# Altium PCB PCB2.PcbDoc
Units mm, origin at the board's own origin, x right, y up, seen from the top; angles counter-clockwise.
Board outline 96.81 x 51.91 mm, 2 copper layers (Top Layer, Bottom Layer); 58 components, 56 nets, 232 pads, 41 vias.
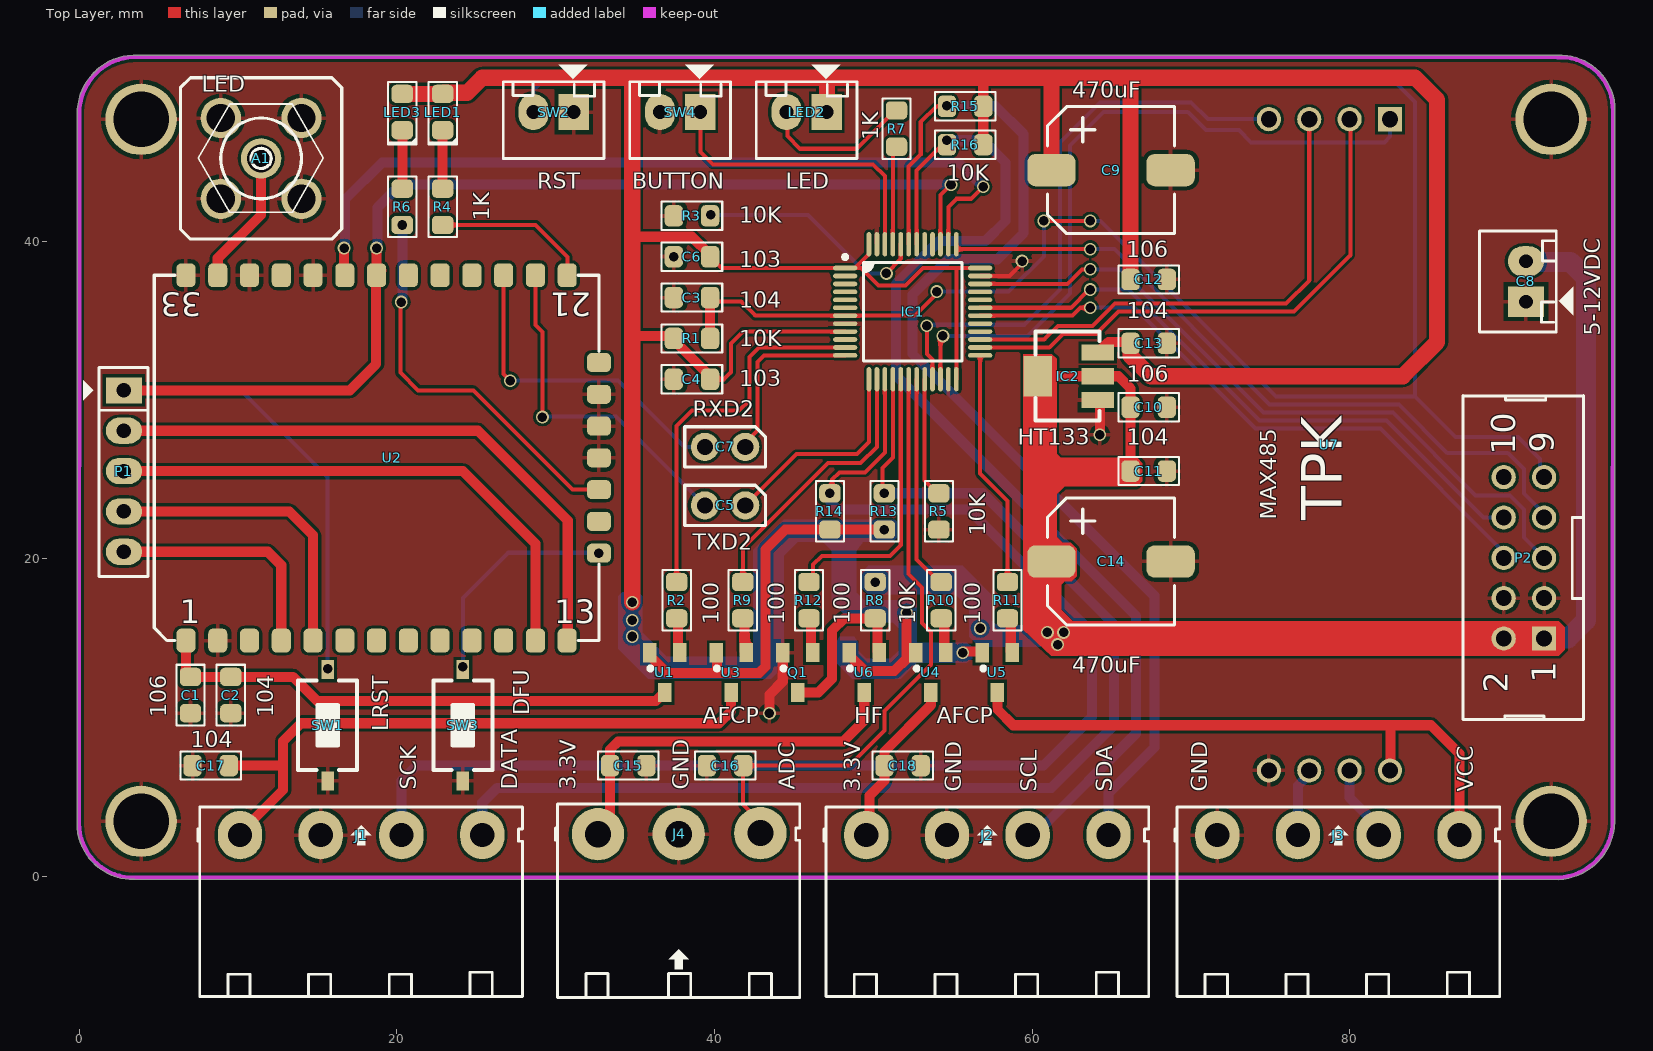
[diagram p0: Top Layer view]
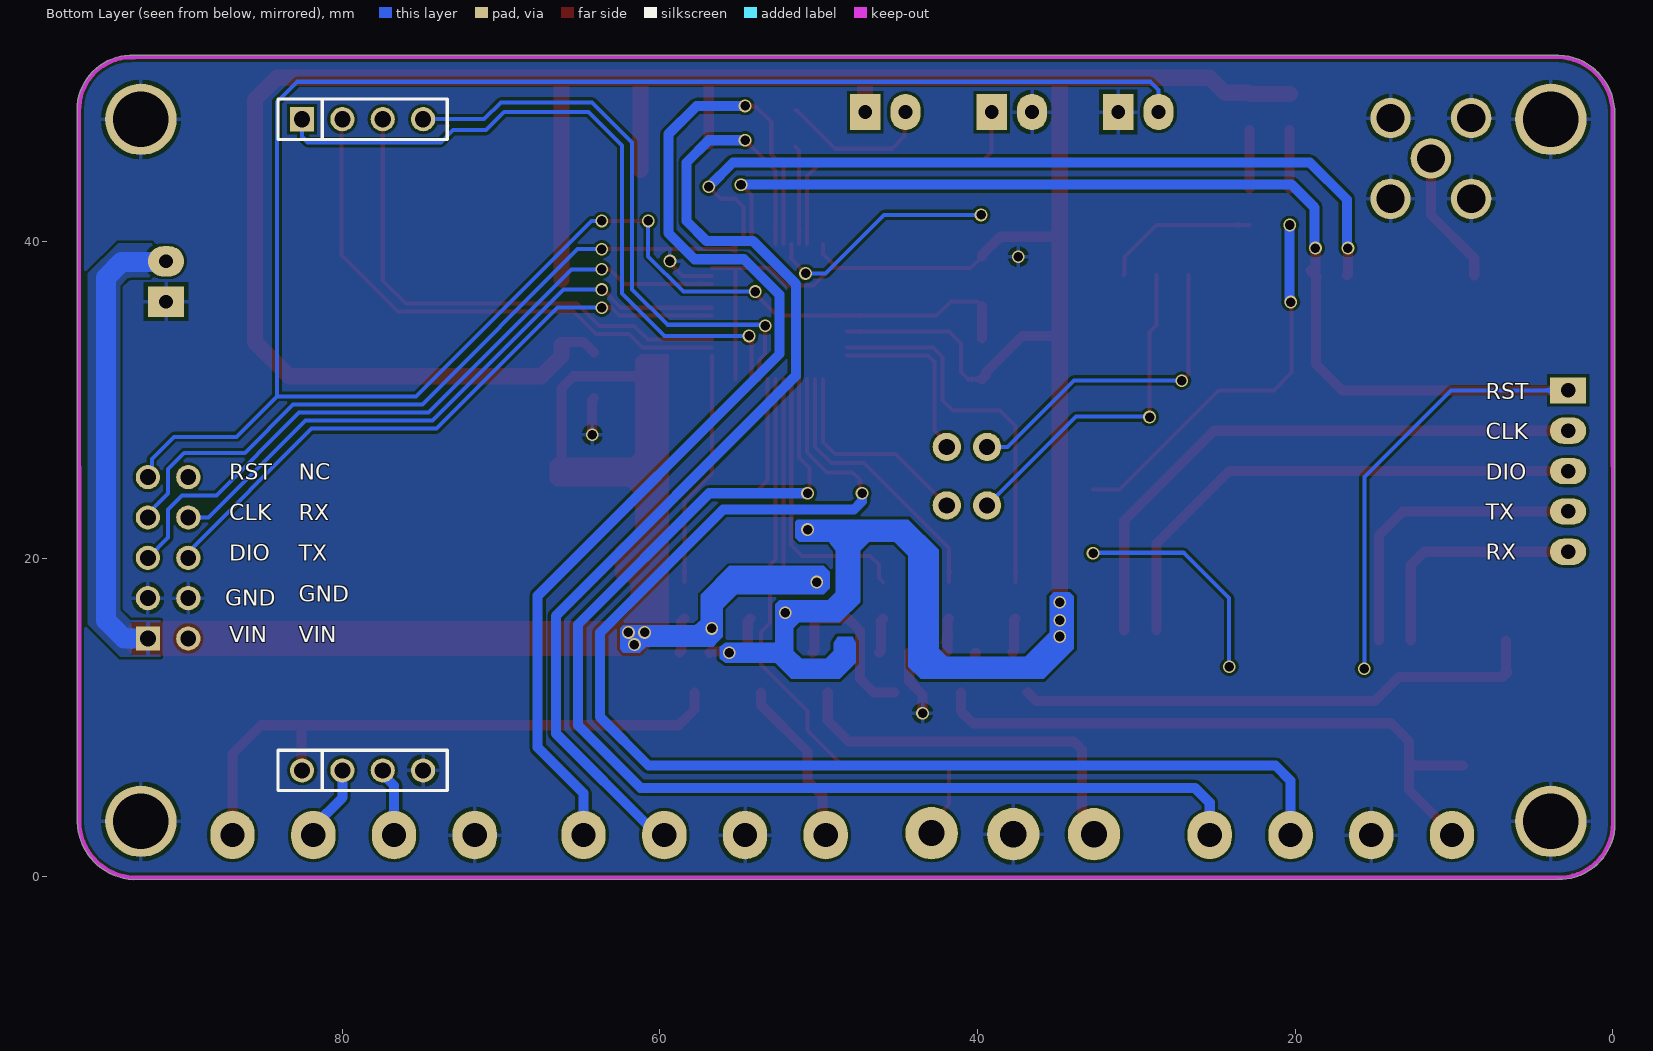
[diagram p1: Bottom Layer view, seen from below]

## Layer stack, top to bottom
Top Solder: solder mask 0.0102, Solder Resist, Dk 3.5
Top Layer: signal copper 0.0356
Dielectric 1: dielectric 0.32, FR-4, Dk 4.8
Bottom Layer: signal copper 0.0356
Bottom Solder: solder mask 0.0102, Solder Resist, Dk 3.5

## Board outline
-0.127,3.339 -0.116,48.26 cw(c0.011,48.26) -0.108,48.306 cw(c3.552,48.049) 3.398,51.714 cw(c3.403,51.587) 3.403,51.714 93.06,51.703 cw(c93.063,51.576) 93.069,51.703 cw(c93.252,48.276) 96.684,48.276 cw(c93.252,48.276) 96.684,48.208 96.672,3.429 cw(c96.545,3.429) 96.672,3.426 cw(c92.957,3.52) 93.16,-0.192 cw(c93.153,-0.065) 93.153,-0.192 3.496,-0.181 cw(c3.388,3.332)

## Design rules (kind name [scope] priority, off if disabled: settings)
Clearance [All] p1: gap=0.178 ignorepadtopadclearanceinfootprint=FALSE
PlaneClearance [All] p1: clearance=0.254
PlaneConnect [All] p1: planeconnectstyle=Relief reliefexpansion=0.254 reliefentries=4 reliefconductorwidth=0.508 reliefairgap=0.254
PolygonConnect [All] p1: connectstyle=Relief reliefconductorwidth=0.254 reliefentries=4 polygonreliefangle="90 Angle" airgapwidth=0.254
RoutingVias [All] p1: holewidth=0.6 width=0.8 viastyle="Through Hole" minholewidth=0.4 minwidth=0.5 maxholewidth=0.7 maxwidth=0.9
SolderMaskExpansion [All] p1: expansion=0.102
Width [All] p1: maxlimit=1.27 minlimit=0.254 preferedwidth=0.635
28 further rules are at their usual default settings.

## Components (designator, comment, footprint, x,y, rotation, side; value= is the part's Value field where it differs from the comment)
A1 "" SMA-V 11.455,45.212 r90 top
C1 "106" "CAP 0805" 7.01,11.43 r270 top value=103
C2 "104" "CAP 0805" 9.55,11.43 r90 top value=103
C3 "104" "CAP 0805" 38.582,36.453 r0 top value=103
C4 "103" "CAP 0805" 38.582,31.31 r180 top
C5 "JP2" JP2-CLOSED 41.935,23.368 r270 top
C6 "103" "CAP 0805" 38.582,39.025 r180 top
C7 "JP2" JP2-CLOSED 41.935,27.051 r270 top
C8 "Header2" Header2 91.084,36.195 r90 top
C9 "470uF" Tu_Nhom 65.049,44.45 r0 top
C10 "106" "CAP 0805" 67.335,29.549 r0 top value=103
C11 "104" "CAP 0805" 67.335,25.527 r0 top value=103
C12 "106" "CAP 0805" 67.335,37.592 r0 top value=103
C13 "104" "CAP 0805" 67.335,33.57 r0 top value=103
C14 "470uF" Tu_Nhom 65.049,19.812 r0 top
C15 "104" "CAP 0805" 34.569,6.985 r0 top value=103
C16 "104" "CAP 0805" 40.665,6.985 r180 top value=103
C17 "104" "CAP 0805" 8.28,6.985 r180 top value=103
C18 "104" "CAP 0805" 51.841,6.985 r0 top value=103
IC1 "ST STM32L152 48PIN" "ST LQFP-48 7x7MM" 52.476,35.56 r0 top
IC2 "HT133" HT7133 63.097,31.754 r0 top
J1 "KF4" KF4 10.128,2.609 r0 top
J2 "KF4" KF4 49.555,2.609 r0 top
J3 "KF4" KF4 71.652,2.609 r0 top
J4 "KF3" KF3-5.08T 32.664,2.667 r0 top
LED1 "LED" "LED 0805" 22.885,48.133 r270 top value="LED 3 - 5 ly 2 Colour"
LED2 "LED" Header2 47.074,48.133 r180 top value="LED 3 - 5 ly 2 Colour"
LED3 "LED" "LED 0805" 20.345,48.133 r270 top value="LED 3 - 5 ly 2 Colour"
P1 "JP5" JP5 2.819,30.607 r270 top
P2 "SPI" IDE_2X5 92.227,14.986 r90 top value="Header 5x2"
Q1 "HF" SOT23B 45.237,12.847 r180 top value=C1815
R1 "10K" "RES 0805/2012" 38.582,33.882 r180 top value=1K
R2 "100" "RES 0805/2012" 37.617,17.399 r90 top value=1K
R3 "10K" "RES 0805/2012" 38.582,41.597 r0 top value=1K
R4 "1K" "RES 0805/2012" 22.885,42.164 r90 top
R5 "10K" "RES 0805/2012" 54.127,22.987 r270 top value=1K
R6 "1K" "RES 0805/2012" 20.345,42.164 r90 top
R7 "1K" "RES 0805/2012" 51.46,47.092 r90 top
R8 "10K" "RES 0805/2012" 50.114,17.399 r90 top value=1K
R9 "100" "RES 0805/2012" 41.783,17.399 r90 top value=1K
R10 "100" "RES 0805/2012" 54.279,17.399 r90 top value=1K
R11 "100" "RES 0805/2012" 58.445,17.399 r90 top value=1K
R12 "100" "RES 0805/2012" 45.948,17.399 r90 top value=1K
R13 "10K" "RES 0805/2012" 50.698,22.987 r270 top value=1K
R14 "10K" "RES 0805/2012" 47.269,22.987 r270 top value=1K
R15 "10K" "RES 0805/2012" 55.778,48.49 r0 top value=1K
R16 "10K" "RES 0805/2012" 55.778,46.077 r0 top value=1K
SW1 "LRST" SW1-SMD 15.646,9.525 r270 top value="SW chip 2 pin"
SW2 "RST" Header2 31.14,48.133 r180 top value="SW chip 2 pin"
SW3 "DFU" SW1-SMD 24.155,9.525 r90 top value="SW chip 2 pin"
SW4 "RST" Header2 39.107,48.133 r180 top value="SW chip 2 pin"
U1 "AO3415" SOT23B 36.855,12.847 r180 top
U2 "RHF76-052" RHF76-052 19.725,26.359 r0 top
U3 "AO3415" SOT23B 41.046,12.847 r180 top
U4 "AO3415" SOT23B 53.619,12.847 r180 top
U5 "AO3415" SOT23B 57.81,12.847 r180 top
U6 "AFCP" SOT23B 49.428,12.847 r180 top
U7 "MAX485 MODULE" "MODULE MAX485" 77.495,27.432 r270 top

## Footprints (in the part's own frame and the unit in brackets; to place one, negate y for a bottom-side part, rotate by r counter-clockwise, add the part's x,y. Pads: shape width x height; smd on the part's side, far side on the other; paste and mask are expansions set on the pad)
"CAP 0805" [mm]
  rrect50% 1.15x1.35 smd: 1(-1.143,0) 2(1.143,0)
  silkscreen extent -1.91,-0.89 1.91,0.89, body extent -1.01,-0.63 1.01,0.64, height 0.64
Header2 [mil] "CON2"
  rect 75x90 hole 34: 1(0,0)
  oval 75x90 hole 34: 2(100,0)
  silkscreen extent -75,-118 175,115, body extent -68,-70 168,107, height 236
HT7133 [mil]
  rect 80x40 smd: 1(40.85,-69.15) 2(40.85,-10.15) 3(40.85,48.85)
  rect 70x100 smd: 4(-108.15,-10.15)
  silkscreen extent -114,-120 45,101, body extent -114,-101 54,80, height 66
IDE_2X5 [mil]
  rect 60x60 hole 39.37: 1(0,0)
  round 60 hole 39.37: 2(0,100) 3(100,0) 4(100,100) 5(200,0) 6(200,100) 7(300,0) 8(300,100) 9(400,0) 10(400,100)
  silkscreen extent -201,-97 602,201, body extent -200,-117 600,231, height 361
JP2-CLOSED [mil]
  round 70 hole 40: 1(0,0) 2(0,-100)
  silkscreen extent -50,-150 50,50, body extent -50,-152 50,50, height 300
JP5 [mil] "JP5"
  rect 65x90 hole 36: 1(0,0)
  oval 65x90 hole 36: 2(100,0) 3(200,0) 4(300,0) 5(400,0)
  silkscreen extent -57,-101 461,60, body extent -48,-53 448,45, height 323
KF3-5.08T [mil] "Header 3, 3 pin, hight 300mil, Pin to Pin 200, Colour Green"
  round 130 hole 65: 1(0,0) 2(200,0) 3(402.62,2.62)
  silkscreen extent -105,-405 500,75, body extent -95,-404 496,68, height 124
KF4 [mil]
  oval 110x120 hole 60: 1(0,0) 2(200,0) 3(400.06,0.06) 4(600.39,0.39)
  silkscreen extent -105,-400 700,70, body extent -87,-406 690,66, height 334
"LED 0805" [mm]
  rrect50% 1.15x1.35 smd: 1(-1.143,0) 2(1.143,0)
  silkscreen extent -1.91,-0.89 2.03,0.89, body extent -1,-0.62 1,0.63, height 0.9
"MODULE MAX485" [mm]
  rect 1.52x1.52 hole 1.02: 1(-20.249,5.029)
  round 1.52 hole 1.02: 2(-20.249,2.489) 3(-20.249,-0.051) 4(-20.249,-2.591) 5(20.751,-2.591) 6(20.751,-0.051) 7(20.751,2.489) 8(20.751,5.029)
  body extent -21.74,-6.02 22.33,7.98, height 19
"RES 0805/2012" [mm]
  rrect50% 1.15x1.35 smd: 1(-1.143,0) 2(1.143,0)
  silkscreen extent -1.91,-0.89 1.91,0.89, body extent -0.95,-0.62 1.05,0.63, height 0.6
RHF76-052 [mm]
  rrect50% 1.2x1.5 smd: 1(-13,-11.5) 2(-11,-11.5) 3(-9,-11.5) 4(-7,-11.5) 5(-5,-11.5) 6(-3,-11.5) 7(-1,-11.5) 8(1,-11.5) 9(3,-11.5) 10(5,-11.5) 11(7,-11.5) 12(9,-11.5) 13(11,-11.5) 21(11,11.5) 22(9,11.5) 23(7,11.5) 24(5,11.5) 25(3,11.5) 26(1,11.5) 27(-1,11.5) 28(-3,11.5) 29(-5,11.5) 30(-7,11.5) 31(-9,11.5) 32(-11,11.5) 33(-13,11.5)
  rrect50% 1.5x1.2 smd: 14(13,-6) 15(13,-4) 16(13,-2) 17(13,0) 18(13,2) 19(13,4) 20(13,6)
  Top Layer lines w0.254: 13,-6 13.05,-6 13.056,-5.994
  silkscreen extent -15,-11.5 13,11.5, body extent -14.99,-11.43 12.95,11.43, height 2.54
SMA-V [mil]
  round 100 hole 70: 1(0,0) 2(100,-100) 3(100,100) 4(-100,100) 5(-100,-100)
  silkscreen extent -200,-200 200,200, body extent -138,-136 137,140, height 386
SOT23B [mm] "SOT 23B"
  rect 0.85x1.2 smd: 1(0.94,-1.245) 2(0,1.25) 3(-0.95,-1.25)
  silkscreen extent 0.77,-0.38 1.02,-0.13, body extent -1.5,-1.3 1.5,1.2, height 1.06
"ST LQFP-48 7x7MM" [mil]
  oval 60x11.5 smd: 1(-167.32,108.27) 2(-167.32,88.58) 3(-167.32,68.9) 4(-167.32,49.21) 5(-167.32,29.53) 6(-167.32,9.84) 7(-167.32,-9.84) 8(-167.32,-29.53) 9(-167.32,-49.21) 10(-167.32,-68.9) 11(-167.32,-88.58) 12(-167.32,-108.27) 25(167.32,-108.27) 26(167.32,-88.58) 27(167.32,-68.9) 28(167.32,-49.21) 29(167.32,-29.53) 30(167.32,-9.84) 31(167.32,9.84) 32(167.32,29.53) 33(167.32,49.21) 34(167.32,68.9) 35(167.32,88.58) 36(167.32,108.27)
  oval 11.5x60 smd: 13(-108.27,-167.32) 14(-88.58,-167.32) 15(-68.9,-167.32) 16(-49.21,-167.32) 17(-29.53,-167.32) 18(-9.84,-167.32) 19(9.84,-167.32) 20(29.53,-167.32) 21(49.21,-167.32) 22(68.9,-167.32) 23(88.58,-167.32) 24(108.27,-167.32) 37(108.27,167.32) 38(88.58,167.32) 39(68.9,167.32) 40(49.21,167.32) 41(29.53,167.32) 42(9.84,167.32) 43(-9.84,167.32) 44(-29.53,167.32) 45(-49.21,167.32) 46(-68.9,167.32) 47(-88.58,167.32) 48(-108.27,167.32)
  silkscreen extent -172,-122 122,141, body extent -178,-178 178,178, height 61
SW1-SMD [mm]
  rect 1.2x0.8 smd: 1(-3.5,0) 2(3.5,0)
  silkscreen extent -2.82,-1.85 2.82,1.85, body extent -3.05,-1.85 3.05,1.85, height 2.5
Tu_Nhom [mil]
  rrect50% 120x80 smd mask+4: 1(-151,1) 2(144.28,1)
  silkscreen extent -161,-156 154,158, body extent -198,-162 192,164

## Part data
A1: library part "CON Ant", "CONNECTOR ANTEN", Manufacturer="Würth Elektronik eiSos GmbH", partNo=210111003, ComponentLink1Description=Manufacturer, ComponentLink1URL=http://www.we-online.de, ComponentLink2Description=Datasheet, ComponentLink2URL=http://katalog.we-online.de/kataloge/eisos/index.php?language=en&pf=Filter_gerade, Created by="Christin Zierenner", Created Date="May 2012"
C1 C2 C3 C4 C6 C10 C11 C12 C13 C15 C16 C17 C18: library part CM, "Cap SMD"
C5 C7: "WR-PHD 2.54 mm Angled Socket Header", Manufacturer="Würth Elektronik eiSos GmbH", partNo=613002143121, ComponentLink1 Description=Manufacturer, ComponentLink1URL=http://www.we-online.com, ComponentLink2 Description=Datasheet, ComponentLink2URL=http://katalog.we-online.de/em/datasheet/6130xx143121.pdf, Created by="Karrer Zheng", Created Date="29 March 2013", NoPins=02
C8: "Header IDC, 2 x 1 Pin Vertical 2.54mm Pitch (Non-Boxed, Male)", Manufacturer="Würth Elektronik eiSos GmbH", partNo=613002143121, ComponentLink1 Description=Manufacturer, ComponentLink1URL=http://www.we-online.com, ComponentLink2 Description=Datasheet, ComponentLink2URL=http://katalog.we-online.de/em/datasheet/6130xx143121.pdf, Created by="Karrer Zheng", Created Date="29 March 2013", NoPins=02
C9 C14: library part CN-ALU-SMD, "Polarized Capacitor (Axial)", LatestRevisionDate=17-Jul-2002, LatestRevisionNote="Re-released for DXP Platform.", PackageReference=POLAR0.8, Published=8-Jun-2000, Publisher="Altium Limited"
IC2: library part HT73XX_1, "HT73XX"
J1 J2 J3: Manufacturer="Würth Elektronik eiSos GmbH", partNo=691133710004, ComponentLink1 Description=Manufacturer, ComponentLink1 URL=http://www.we-online.com, ComponentLink2 Description=Datasheet, ComponentLink2 URL=http://katalog.we-online.de/em/datasheet/6911337100xx.pdf, Created by="Baojun Chen", Created Date=4-Aug-15, NoPins=4
J4: Manufacturer="Würth Elektronik eiSos GmbH", partNo=691103110003, ComponentLink1 Description=Manufacturer, ComponentLink1URL=http://www.we-online.com, ComponentLink2 Description=Datasheet, ComponentLink2URL=http://katalog.we-online.de/em/datasheet/6911031100xx.pdf, Created by="Karrer Zheng", Created Date="29 October 2013", NoPins=3
LED1 LED2 LED3: library part "LED SMD"
P2: library part "IDE 5x2", "Header 5x2"
Q1: library part C1815, "NPN 600mW, ECB", =C2383
R1 R2 R3 R4 R5 R6 R7 R8 R9 R10 R11 R12 R13 R14 R15 R16: library part RM, "Resistor SMD"
SW1 SW2 SW3 SW4: library part SW2, "Switch button 2 pin"
U6: library part AO3415

## Free pads (board coordinates)
  round 4.5 hole 3.5: 1(3.897,47.674) 2(3.897,3.478) 3(92.67,3.478) 4(92.67,47.674)

## Via types
v1: diameter 0.8, hole 0.6, Top Layer to Bottom Layer, tented both sides, 41 vias

## Nets (pads, with @x,y where several pads share a name; then routed paths per layer and width w, separated by ;. In a path a pad name is that pad's centre, name@x,y a point inside that pad or via, vN(x,y) a via of type N, cw(c..) or ccw(c..) an arc to the next point about the centre after c; other vN are vias at no path point)
ADC: C16.1 IC1.18 J4.3 | length 38.4
  Top Layer w0.254: J4.3 42.891,3.442 41.808,4.525 C16.1 48.488,6.985 50.698,9.195 50.698,10.414 53.619,13.335 53.619,15.404 53.069,15.953 53.069,18.199 52.226,19.042 IC1.18
ADC_EN: IC1.17 R12.2 | length 17.7
  Top Layer w0.254: R12.2 46.209,18.802 46.209,19.641 46.761,20.193 51.034,20.193 51.726,20.885 IC1.17
CLK: IC1.37 P2.7 | length 45.1
  Top Layer w0.254: IC1.37@55.226,39.388 IC1.37@55.244,39.37 ; IC1.37 55.226,39.515 55.244,39.497 v1(63.652,39.497)
  Bottom Layer w0.254: v1@63.906,39.497 65.176,39.497 74.955,29.718 83.083,29.718 86.131,26.67 89.941,26.67 90.957,25.654 90.957,24.13 92.227,22.86 P2.7
DATA: IC1.16 J1.4 R13.1 | length 75.1
  Top Layer w0.254: R13.1@50.571,24.568 50.571,25.717 51.226,26.372 IC1.16
  Bottom Layer w0.635: J1.4 25.378,4.652 26.314,5.588 61.214,5.588 65.151,9.525 65.151,15.875 56.896,24.13 v1(50.698,24.13)
DE: IC1.27 U7.3 | length 32.4
  Top Layer w0.254: IC1.27 60.759,33.81 61.62,34.671 63.803,34.671 65.2,36.068 75.971,36.068 77.444,37.541 U7.3
DIO: IC1.34 P2.5 | length 44.4
  Top Layer w0.254: IC1.34 62.227,37.31 63.144,38.227 v1(63.652,38.227) v1@63.843,38.227
  Bottom Layer w0.254: v1@63.843,38.227 65.557,38.227 74.574,29.21 82.702,29.21 87.909,24.003 90.068,24.003 90.957,23.114 90.957,21.336 P2.5
GND: A1.2 A1.3 A1.4 A1.5 C1.2 C2.1 C3.1 C4.2 C6.2 C8.1 C9.2 C10.2 C11.2 C12.2 C13.2 C14.2 C15.2 C16.2 C17.2 C18.2 IC1.8 IC1.23 IC1.35 IC1.47 IC2.1 J1.2 J2.2 J3.1 J4.2 P2.3 P2.4 pad.1 pad.2 pad.3 pad.4 Q1.1 R3.1 R5.2 SW1.2 SW2.1 SW3.1 SW4.2 U2.2 U2.17 U2.18 U2.19 U2.29 U2.31 U2.33 U7.5 | length 10.2
  Top Layer w0.254: C16.2 39.649,7.112 C16.2@39.649,6.858 ; IC1.35 58.573,37.81 59.363,38.6 v1(59.363,38.748) ; IC2.1 IC2.1@64.135,30.124
  Top Layer w0.635: v1(43.459,10.287) 43.459,11.449 44.297,12.287 Q1.1 ; IC2.1@64.135,30.124 64.262,29.997 v1(64.262,27.812)
  other v1: 37.439,39.025
I2C_EN: IC1.19 R10.2 | length 13.5
  Top Layer w0.254: IC1.19 52.726,19.967 54.151,18.542 R10.2
"MOSITURE EN": IC1.25 R11.2 | length 15
  Top Layer w0.254: IC1.25 56.726,25.373 58.445,23.654 R11.2
NetA1_1: A1.1 U2.32 | length 8.5
  Top Layer w0.635: U2.32 8.725,38.926 11.455,41.656 A1.1
NetC1_1: C1.1 C2.2 U1.2 U2.1 | length 33.2
  Top Layer w0.635: U2.1 6.725,13.003 6.653,12.93 6.653,12.831 6.91,12.573 C1.1 ; C1.1@7.051,12.614 7.091,12.573 C2.2 13.462,12.573 14.986,11.049 36.307,11.049 U1.2
NetC15_1: C15.1 J4.1 U6.2 | length 24.2
  Top Layer w0.635: J4.1 33.426,3.429 C15.1 33.426,8.001 33.934,8.509 48.112,8.509 49.428,9.825 U6.2
NetC17_1: C17.1 J1.1 U3.2 | length 40.6
  Top Layer w0.635: C17.1 12.713,6.985 12.84,7.112 ; J1.1@10.128,2.736 12.84,5.448 12.84,7.112 ; U3.2 41.046,10.414 40.284,9.652 13.97,9.652 12.84,8.522 12.84,7.112
NetC18_1: C18.1 J2.1 U4.2 | length 10.7
  Top Layer w0.635: J2.1 49.759,2.813 49.759,5.086 50.698,6.025 C18.1 50.698,7.87 53.619,10.791 U4.2
NetIC1_20: IC1.20 R5.1 | length 7.7
  Top Layer w0.254: IC1.20 53.226,24.928 R5.1@54.151,24.003
NetIC1_44: IC1.44 R3.2 | length 14.8
  Top Layer w0.254: v1(50.825,37.973) 51.719,38.867 51.719,39.803 IC1.44
  Bottom Layer w0.254: v1(39.776,41.656) 45.872,41.656 49.555,37.973 v1(50.825,37.973)
NetIC1_45: IC1.45 R7.1 | length 6.2
  Top Layer w0.254: IC1.45 51.226,45.715 R7.1
NetIC1_46: IC1.46 SW4.1 | length 19
  Top Layer w0.254: SW4.1 39.107,45.627 39.903,44.831 49.991,44.831 50.726,44.096 IC1.46
NetJ3_1: J3.4 U5.2 U7.8 | length 39.2
  Top Layer w0.635: U5.2 57.81,10.516 58.801,9.525 82.498,9.525 ; U7.8 82.55,6.707 82.55,9.525 85.115,9.525 86.902,7.739 J3.4
NetJ3_2: J3.3 U7.7 | length 4.8
  Bottom Layer w0.635: U7.7 79.984,4.968 81.813,3.139 J3.3
NetJ3_3: J3.2 U7.6 | length 4.4
  Bottom Layer w0.635: J3.2 76.732,5.729 77.444,6.441 U7.6
NetLED1_2: LED1.2 R4.2 | length 3.7
  Top Layer w0.635: R4.2 LED1.2
NetLED2_2: LED2.2 R7.2 | length 10
  Top Layer w0.254: LED2.2 LED2.2@44.602,48.133 ; LED2.2@44.729,48.26 LED2.2@44.602,48.133 ; R7.2 51.36,48.235 48.945,45.82 45.386,45.82 44.597,46.609 44.597,48.128 LED2.2@44.602,48.133
NetLED3_2: LED3.2 R6.2 | length 3.7
  Top Layer w0.635: R6.2 LED3.2
NetQ1_2: Q1.2 R8.1 U6.3 | length 10.9
  Top Layer w0.635: Q1.2 46.547,11.597 47.396,12.446 47.396,15.49 48.162,16.256 R8.1 50.271,16.099 50.271,14.205 U6.3
NetQ1_3: Q1.3 R12.1 | length 2.3
  Top Layer w0.635: R12.1 46.08,16.125 46.08,14.205 Q1.3
NetR2_1: R2.1 U1.3 | length 2.2
  Top Layer w0.635: R2.1 37.711,16.162 37.711,14.191 U1.3
NetR4_1: R4.1 U2.21 | length 9.8
  Top Layer w0.254: R4.1 28.727,41.021 30.732,39.016 30.732,37.944 U2.21@30.791,37.885
NetR6_1: R6.1 U2.16 | length 24.8
  Top Layer w0.254: v1@20.223,36.169 20.223,31.72 21.336,30.607 24.825,30.607 31.073,24.359 U2.16
  Bottom Layer w0.635: v1@20.345,36.195 v1(20.345,41.021)
  other v1: 20.279,36.169
NetR9_1: R9.1 U3.3 | length 2.2
  Top Layer w0.635: R9.1 41.889,16.149 41.889,14.204 U3.3
NetR10_1: R10.1 U4.3 | length 2.3
  Top Layer w0.635: R10.1 54.462,16.074 54.462,14.205 U4.3
NetR11_1: R11.1 U5.3 | length 2.3
  Top Layer w0.635: R11.1 58.653,16.048 58.653,14.205 U5.3
NetSW3_2: SW3.2 U2.14 | length 14.5
  Top Layer w0.254: SW3.2 24.211,13.081 24.282,13.081 v1(24.155,13.208)
  Bottom Layer w0.254: v1(24.155,13.208) 24.155,17.526 27.014,20.385 v1@32.791,20.385
  other v1: 32.725,20.359
RE: IC1.26 U7.2 | length 34.4
  Top Layer w0.254: IC1.26 61.075,33.31 61.928,34.163 64.033,34.163 65.43,35.56 76.479,35.56 80.035,39.116 80.035,47.63 U7.2
  Bottom Layer w0.254: U7.2@79.946,47.643 U7.2
RH_CLK: P1.2 U2.13 | length 37.2
  Top Layer w0.635: P1.2 25.108,28.067 30.759,22.416 U2.13@30.759,15.502
RH_DIO: P1.3 U2.12 | length 33.4
  Top Layer w0.635: P1.3@2.692,25.4 P1.3 24.155,25.527 28.727,20.955 U2.12@28.727,15.534
RH_EN: IC1.11 R2.2 | length 24.1
  Top Layer w0.254: R2.2 37.617,28.372 38.582,29.337 41.554,29.337 42.189,29.972 42.189,32.705 42.794,33.31 IC1.11
RH_PA0: IC1.38 U2.28 | length 51.6
  Top Layer w0.254: IC1.38 54.726,42.154 55.244,42.672 56.159,42.672 v1(56.921,43.434)
  Top Layer w0.635: v1(16.677,39.567) 16.677,37.907 U2.28
  Bottom Layer w0.635: v1@16.743,39.593 16.743,42.626 19.075,44.958 55.397,44.958 v1(56.921,43.434)
RH_RST: IC1.39 P1.1 SW1.1 U2.27 | length 94.6
  Top Layer w0.254: IC1.39 54.226,42.898 v1(54.889,43.561)
  Top Layer w0.635: P1.1 17.043,30.607 18.694,32.258 U2.27@18.694,37.773 ; U2.27@18.628,37.747 U2.27@19.025,38.144 ; U2.27 18.725,38.144 v1@18.725,39.44
  Bottom Layer w0.254: P1.1 10.185,30.607 15.646,25.146 v1(15.646,13.081)
  Bottom Layer w0.635: v1@18.791,39.593 18.791,42.134 20.218,43.561 v1(54.889,43.561)
  other v1: 18.725,39.567
RH_RX: C7.2 U2.23 | length 20.7
  Top Layer w0.254: U2.23 26.725,31.628 v1(27.137,31.216)
  Bottom Layer w0.254: v1@27.203,31.242 33.934,31.242 38.125,27.051 C7.2
RH_RX1: P1.5 U2.4 | length 15
  Top Layer w0.635: P1.5 11.881,20.447 12.725,19.603 U2.4
RH_TX: C5.2 U2.22 | length 21.6
  Top Layer w0.254: U2.22 28.725,34.728 29.169,34.284 v1(29.169,28.93)
  Bottom Layer w0.254: v1@29.235,28.956 33.807,28.956 C5.2
RH_TX1: P1.4 U2.5 | length 19.2
  Top Layer w0.635: P1.4 13.233,22.987 14.725,21.495 U2.5
RST: C3.2 IC1.7 P2.9 R1.1 SW2.2 | length 141.9
  Top Layer w0.254: C3.2@39.986,36.193 41.683,36.193 42.566,35.31 IC1.7 52.607,35.31 54,36.703 v1(54,36.83) ; v1(60.731,41.275) v1(63.652,41.275)
  Top Layer w0.635: R1.1 C3.2@39.725,35.932
  Bottom Layer w0.254: SW2.2 28.6,49.53 29.108,50.038 82.829,50.038 84.099,48.768 84.099,30.226 ; v1(54,36.83) 58.515,36.83 60.731,39.046 v1(60.731,41.275) ; v1(63.652,41.275) 64.287,41.275 75.336,30.226 84.099,30.226 ; P2.9 91.984,25.389 91.984,26.278 90.576,27.686 86.639,27.686 84.099,30.226
RXD1: IC1.31 P2.8 | length 39.4
  Top Layer w0.254: IC1.31 62.429,35.81 63.576,36.957 v1(63.652,36.957)
  Bottom Layer w0.254: v1(63.652,36.957) 66.065,36.957 74.32,28.702 82.321,28.702 88.417,22.606 P2.8
RXD2: C7.1 IC1.12 | length 11.4
  Top Layer w0.254: C7.1 41.935,27.323 42.697,28.085 42.697,32.385 43.122,32.81 IC1.12
RXD3: IC1.22 U7.1 | length 44.3
  Top Layer w0.254: IC1.22 54.226,33.733 54.381,33.888 v1(54.381,34.036)
  Bottom Layer w0.254: v1(54.381,34.036) 59.715,34.036 62.382,36.703 62.382,46.017 64.498,48.133 69.794,48.133 70.937,46.99 73.025,46.99 73.787,46.228 82.169,46.228 82.524,46.583 U7.1
SCK: IC1.15 J1.3 R14.1 | length 83.4
  Top Layer w0.254: R14.1@47.396,24.511 47.396,24.992 47.856,25.452 49.48,25.452 50.726,26.698 IC1.15
  Bottom Layer w0.635: J1.3 20.289,6.04 21.234,6.985 60.706,6.985 63.754,10.033 63.754,15.367 56.007,23.114 47.777,23.114 47.269,23.622 v1(47.269,24.13)
SCL: IC1.42 J2.3 R16.1 | length 67.3
  Top Layer w0.254: IC1.42 52.726,44.446 R16.1@54.357,46.077
  Bottom Layer w0.635: v1(54.635,46.355) 56.921,46.355 58.318,44.958 58.318,41.275 57.048,40.005 54.123,40.005 51.435,37.317 51.435,31.521 66.548,16.408 66.548,9.017 60.396,2.865 J2.3@59.717,2.865
SDA: IC1.43 J2.4 R15.1 | length 72
  Top Layer w0.254: IC1.43 52.226,44.708 52.984,45.466 52.984,47.498 53.976,48.49 R15.1
  Bottom Layer w0.635: v1(54.635,48.514) 57.683,48.514 59.461,46.736 59.461,40.513 57.81,38.862 54.705,38.862 52.47,36.627 52.47,32.899 67.691,17.678 67.691,8.128 64.805,5.242 J2.4
SHT75_EN: IC1.14 R9.2 | length 17.5
  Top Layer w0.254: R9.2 41.783,20.676 47.142,26.035 49.205,26.035 50.226,27.056 IC1.14
TXD1: IC1.30 P2.6 | length 39.9
  Top Layer w0.254: IC1.30 62.54,35.31 63.044,35.814 v1@63.843,35.814
  Bottom Layer w0.254: v1@63.843,35.814 66.446,35.814 74.066,28.194 81.94,28.194 89.687,20.447 P2.6
  other v1: 63.652,35.814
TXD2: C5.1 IC1.13 | length 13.4
  Top Layer w0.254: C5.1 45.161,26.594 48.959,26.594 49.726,27.361 IC1.13
TXD3: IC1.21 U7.4 | length 37
  Top Layer w0.254: v1@53.111,34.671 v1(53.365,34.671) 53.365,32.893 53.719,32.539 53.719,31.317 IC1.21
  Bottom Layer w0.254: v1(53.365,34.671) 53.435,34.741 59.531,34.741 61.747,36.957 61.747,46.228 64.262,48.743 70.002,48.743 71.064,47.681 U7.4
VCC: C4.1 C6.1 C9.1 C12.1 C13.1 IC1.1 IC1.9 IC1.24 IC1.36 IC1.48 IC2.3 LED1.1 LED2.1 LED3.1 R1.2 R13.2 R14.2 R15.2 R16.2 U1.1 U3.1 U4.1 U5.1 U6.1 | length 292.1
  Top Layer w0.254: C4.1 40.606,31.31 41.046,31.75 41.046,33.553 41.803,34.31 IC1.9 ; C6.1 39.725,39.012 40.427,38.31 IC1.1 48.233,38.303 49.225,38.303 50.317,37.211 52.019,37.211 53.118,38.31 55.143,38.31 ; IC1.1@48.86,38.328 49.726,39.194 IC1.48 ; IC1.24 55.226,38.227 55.143,38.31 ; IC1.36 55.143,38.31
  Top Layer w0.635: 34.823,34.036 37.185,34.036 39.468,31.753 39.468,31.567 C4.1 ; 35.055,40.281 38.57,40.281 39.725,39.125 C6.1 ; U1.1 35.915,13.917 37.005,12.827 40.157,12.827 ; U3.1 40.157,14.041 40.157,12.827 ; U6.1 48.488,13.917 49.451,12.954 51.333,12.954 52.095,13.716 v1(52.095,16.609) ; v1(50.698,21.844) R14.2 44.45,21.844 43.205,20.599 43.205,13.208 42.824,12.827 40.157,12.827 ; v1(55.626,14.097) 55.688,14.159 56.802,14.159 U5.1 ; 56.87,50.292 cw(c56.87,50.241) 56.921,50.241 R15.2 R16.2 ; IC2.3 64.795,33.655 66.007,33.655 66.192,33.47 C13.1
  Top Layer w1.016: LED3.1 LED1.1 22.952,49.343 24.429,49.343 25.378,50.292 34.823,50.292 ; v1(34.823,17.272) 34.823,34.036 34.823,50.292 ; LED2.1 47.074,50.122 cw(c47.244,50.122) 47.244,50.292 ; C9.1 61.214,50.292 ; C13.1@66.192,33.47 66.192,32.766 67.462,31.496 83.337,31.496 85.496,33.655 85.496,48.904 84.108,50.292 66.192,50.292 ; C12.1 66.192,50.292 ; 34.823,50.292 47.244,50.292 ; 47.244,50.292 56.87,50.292 61.214,50.292 ; 61.214,50.292 66.192,50.292
  Bottom Layer w0.635: v1(34.823,17.272) v1(34.823,16.129) v1(34.823,15.113) 36.855,13.081 42.824,13.081 43.205,13.462 43.205,20.193 44.856,21.844 48.412,21.844 ; 48.412,14.224 48.412,13.97 49.301,13.081 51.46,13.081 52.095,13.716 52.095,14.097 ; v1(50.698,21.844) 48.412,21.844 ; v1(55.626,14.097) 52.095,14.097 ; 48.412,21.844 48.285,21.717 48.285,17.526 49.202,16.609 v1(52.095,16.609) 52.095,14.097
Vin: C8.2 C10.1 C11.1 C14.1 IC2.2 IC2.4 P2.1 P2.2 R8.2 | length 109.6
  Top Layer w0.635: v1(56.726,15.621) 56.726,15.576 v1@56.763,15.54 ; IC2.4 IC2.2 65.43,31.496 66.192,30.734 C10.1 C11.1
  Top Layer w1.27: IC2.4 60.604,31.242 60.604,25.654 ; C14.1@61.62,19.456 61.239,19.837 C14.1 C14.1@61.214,19.787 ; C11.1 60.731,25.527 60.604,25.654 ; C8.2 C8.2@91.206,38.613 ; P2.1@92.342,15.101 P2.1 P2.2 63.37,14.986 63.365,14.991 62.606,14.991 61.214,16.383 C14.1@61.214,19.787 ; 60.604,25.654 60.604,19.939 60.985,19.558 C14.1@61.214,19.787
  Bottom Layer w0.635: v1(50.114,18.542) 55.397,18.542 56.726,17.213 v1(56.726,15.621) ccw(c56.98,15.621) 56.98,15.367 v1(60.96,15.367) v1(61.976,15.367) ccw(c61.976,14.986) 61.595,14.986 v1(61.595,14.605)
  Bottom Layer w1.27: C8.2 91.121,38.698 93.871,38.698 94.869,37.7 94.869,16.129 93.726,14.986 P2.1
pads on no net: IC1.2 IC1.3 IC1.4 IC1.5 IC1.6 IC1.10 IC1.28 IC1.29 IC1.32 IC1.33 IC1.40 IC1.41 P2.10 U2.3 U2.6 U2.7 U2.8 U2.9 U2.10 U2.11 U2.15 U2.20 U2.24 U2.25 U2.26 U2.30

## Polygon pours and split planes (outlines as drawn)
GND on Bottom Layer "Bottom Layer-GND" (solid, pour order 70): -0.102,46.533 -0.102,49.124 cw(c2.438,49.124) 2.438,51.664 94.005,51.664 cw(c94.005,49.124) 96.545,49.124 96.545,2.486 cw(c94.005,2.486) 94.005,-0.054 2.54,-0.054 cw(c2.54,2.486) 0,2.486 0,5.359
Vin on Bottom Layer "Bottom Layer-Vin" (solid, pour order 42): 91.313,16.129 93.345,16.129 93.98,16.764 93.98,37.211 93.491,37.7 93.345,37.7 93.326,37.719 90.297,37.719 89.789,38.227 89.789,39.37 90.297,39.878 94.107,39.878 96.012,37.973 96.012,15.875 93.98,13.843 91.313,13.843 91.059,14.097 91.084,14.122 91.084,15.748
GND on Top Layer "Top Layer-GND" (solid, pour order 60): 0.011,47.879 0.011,49.2 cw(c2.551,49.2) 2.551,51.74 94.082,51.74 cw(c94.082,49.2) 96.622,49.2 96.622,2.362 cw(c94.082,2.362) 94.082,-0.178 2.413,-0.178 cw(c2.413,2.362) -0.127,2.362 -0.127,3.683
GND on Top Layer "Top Layer-GND 1" (solid, pour order 50): 0.127,47.681
GND on Top Layer "Top Layer-GND 2" (solid, pour order 48): 0.011,47.879
GND on Top Layer "Top Layer-GND 3" (solid, pour order 46): 0.011,48.26

## Keep-outs
Keep-Out Layer:
  lines w0.254: 0.011,48.093 cw(c3.552,48.049) 3.403,51.587 93.062,51.576 ; 0.011,48.26 0,3.339 ccw(c3.388,3.332) 3.494,-0.054 93.153,-0.065 ccw(c92.957,3.52) 96.545,3.429 96.556,48.276 ; 93.061,51.575 cw(c93.252,48.276) 96.555,48.182 ; 93.062,51.576 93.063,51.576

## Other copper
Top Layer:
  region net Vin: 59.436,15.548 59.436,32.893 61.241,32.893 61.531,32.603 61.531,26.759 61.531,26.607 61.785,26.352 66.611,26.352 66.929,26.035 66.929,24.892 66.611,24.575 62.039,24.575 61.531,24.066 61.531,21.399 61.912,21.018 62.42,21.018 62.801,20.638 62.801,18.914 62.493,18.605 62.039,18.605 61.785,18.351 61.785,16.825 62.545,16.066 64.12,16.066 93.154,16.065 93.536,15.684 93.535,14.287 93.165,13.917 61.213,13.917
Bottom Layer:
  region net Vin: 57.429,16.129 57.81,15.811 62.296,15.811 62.484,15.624 62.484,14.326 62.296,14.097 61.276,14.097 60.867,14.478 57.531,14.478 56.65,14.478 56.037,15.116
  region net VCC: 52.578,14.923 52.769,14.732 55.88,14.732 56.223,14.478 56.223,13.716 55.88,13.462 52.73,13.462 52.603,13.589 52.578,13.589
  region net VCC: 54.737,14.859
  region net VCC: 47.841,15.113 47.65,14.732 47.65,13.462 48.666,12.446 51.714,12.446 52.73,13.462 52.73,17.145 52.603,17.272 52.476,17.399 52.349,17.399 49.428,17.399 48.92,17.907 48.92,20.506 49.365,21.082 51.206,21.082 51.46,21.336 51.46,22.352 51.333,22.479 50.825,22.479 44.348,22.479 42.443,20.574 42.443,19.939 42.443,14.351 41.935,13.843 36.982,13.843 35.458,15.367 35.458,17.653 35.204,17.907 34.188,17.907 33.934,17.653 33.934,14.351 35.839,12.446 43.586,12.446 44.348,13.208 44.348,20.193 45.237,21.082 46.82,21.082 47.396,20.506 47.396,17.272 48.666,16.002 51.206,16.002 51.587,15.621 51.587,14.224 51.079,13.716 49.555,13.716 49.047,14.224 49.047,14.351 49.047,14.732 48.793,15.113
  region net Vin: 49.301,19.177 49.682,19.558 55.626,19.558 57.429,17.755 57.429,15.113 57.239,14.923 56.223,14.923 56.032,15.113 56.032,16.891 55.143,17.78 49.682,17.78 49.301,18.161

## Silkscreen, mask and mechanical layers (free items; w line width, h text height)
Top Overlay:
  text "LED" at 7.713,49.403 h1.02
  text "470uF" at 62.509,49.022 h1.02
  text "1K" at 50.317,46.355 h1.02 r90
  text "10K" at 54.635,43.815 h1.02
  text "RST" at 28.854,43.307 h1.02
  text "BUTTON" at 34.823,43.307 h1.02
  text "LED" at 44.475,43.307 h1.02
  text "1K" at 25.806,41.275 h1.02 r90
  text "10K" at 41.554,41.148 h1.02
  text "106" at 65.913,38.989 h1.02
  text "103" at 41.554,38.36 h1.02
  text "104" at 41.554,35.814 h1.02
  text "104" at 65.938,35.137 h1.02
  text "5-12VDC" at 95.758,34.036 h1.02 r90
  text "10K" at 41.554,33.401 h1.02
  text "106" at 65.938,31.157 h1.02
  text "103" at 41.554,30.861 h1.02
  text "RXD2" at 38.633,28.956 h1.02
  text "HT133" at 59.08,27.178 h1.02
  text "104" at 65.938,27.178 h1.02
  text "MAX485" at 75.362,22.479 h1.02 r90
  text "TPK" at 79.502,22.428 h2.54 r90
  text "10K" at 57.048,21.463 h1.02 r90
  text "TXD2" at 38.633,20.574 h1.02
  text "100" at 40.28,15.875 h1.02 r90
  text "100" at 44.396,15.875 h1.02 r90
  text "100" at 48.511,15.875 h1.02 r90
  text "10K" at 52.627,15.875 h1.02 r90
  text "100" at 56.742,15.875 h1.02 r90
  text "470uF" at 62.509,12.827 h1.02
  text "DFU" at 28.346,10.16 h1.02 r90
  text "106" at 5.486,10.033 h1.02 r90
  text "104" at 12.217,10.033 h1.02 r90
  text "AFCP" at 39.268,9.652 h1.02
  text "HF" at 48.793,9.652 h1.02
  text "AFCP" at 54,9.652 h1.02
  text "LRST" at 19.456,9.144 h1.02 r90
  text "104" at 7.01,8.128 h1.02
  text "SCK" at 21.234,5.461 h1.02 r90
  text "DATA" at 27.584,5.461 h1.02 r90
  text "3.3V" at 31.267,5.461 h1.02 r90
  text "GND" at 38.379,5.461 h1.02 r90
  text "ADC" at 45.059,5.461 h1.02 r90
  text "3.3V" at 49.174,5.334 h1.02 r90
  text "GND" at 55.524,5.334 h1.02 r90
  text "SCL" at 60.287,5.334 h1.02 r90
  text "SDA" at 65.049,5.334 h1.02 r90
  text "GND" at 71.018,5.334 h1.02 r90
  text "VCC" at 87.782,5.334 h1.02 r90
Bottom Overlay:
  text "RST" at 8.001,30.048 h1.02
  text "CLK" at 8.001,27.521 h1.02
  text "DIO" at 8.001,24.994 h1.02
  text "NC" at 82.727,24.994 h1.02
  text "RST" at 87.096,24.994 h1.02
  text "TX" at 8.001,22.466 h1.02
  text "RX" at 82.727,22.435 h1.02
  text "CLK" at 87.096,22.435 h1.02
  text "RX" at 8.001,19.939 h1.02
  text "TX" at 82.727,19.875 h1.02
  text "DIO" at 87.096,19.875 h1.02
  text "GND" at 82.727,17.316 h1.02
  text "GND" at 87.35,17.062 h1.02
  text "VIN" at 82.727,14.757 h1.02
  text "VIN" at 87.096,14.757 h1.02

## Dimensions
93.06,51.703 to 93.16,-0.192 on Top Overlay
0.011,48.26 to 96.556,48.276 on Top Overlay

## Text inside footprints (layer, text, board x,y; h text height)
P2: Top Overlay "10" at 90.424,26.568 h1.52 r90; Top Overlay "9" at 92.837,26.695 h1.52 r90; Top Overlay "2" at 89.941,11.557 h1.52 r90; Top Overlay "1" at 92.977,12.211 h1.52 r90
U2: Top Overlay "1" at 6.325,15.959 h1.5; Top Overlay "13" at 29.925,15.959 h1.5; Top Overlay "21" at 32.225,36.759 h1.5 r180; Top Overlay "33" at 7.725,36.759 h1.5 r180